# Altium PCB SubNodeMainBoard.PcbDoc
Units mm, origin at the board's own origin, x right, y up, seen from the top; angles counter-clockwise.
Board outline 61.6 x 91.44 mm, 2 copper layers (Top Layer, Bottom Layer); 6 components, 13 nets, 59 pads, 0 vias.
Unrouted connection lines stored in the file: 2.
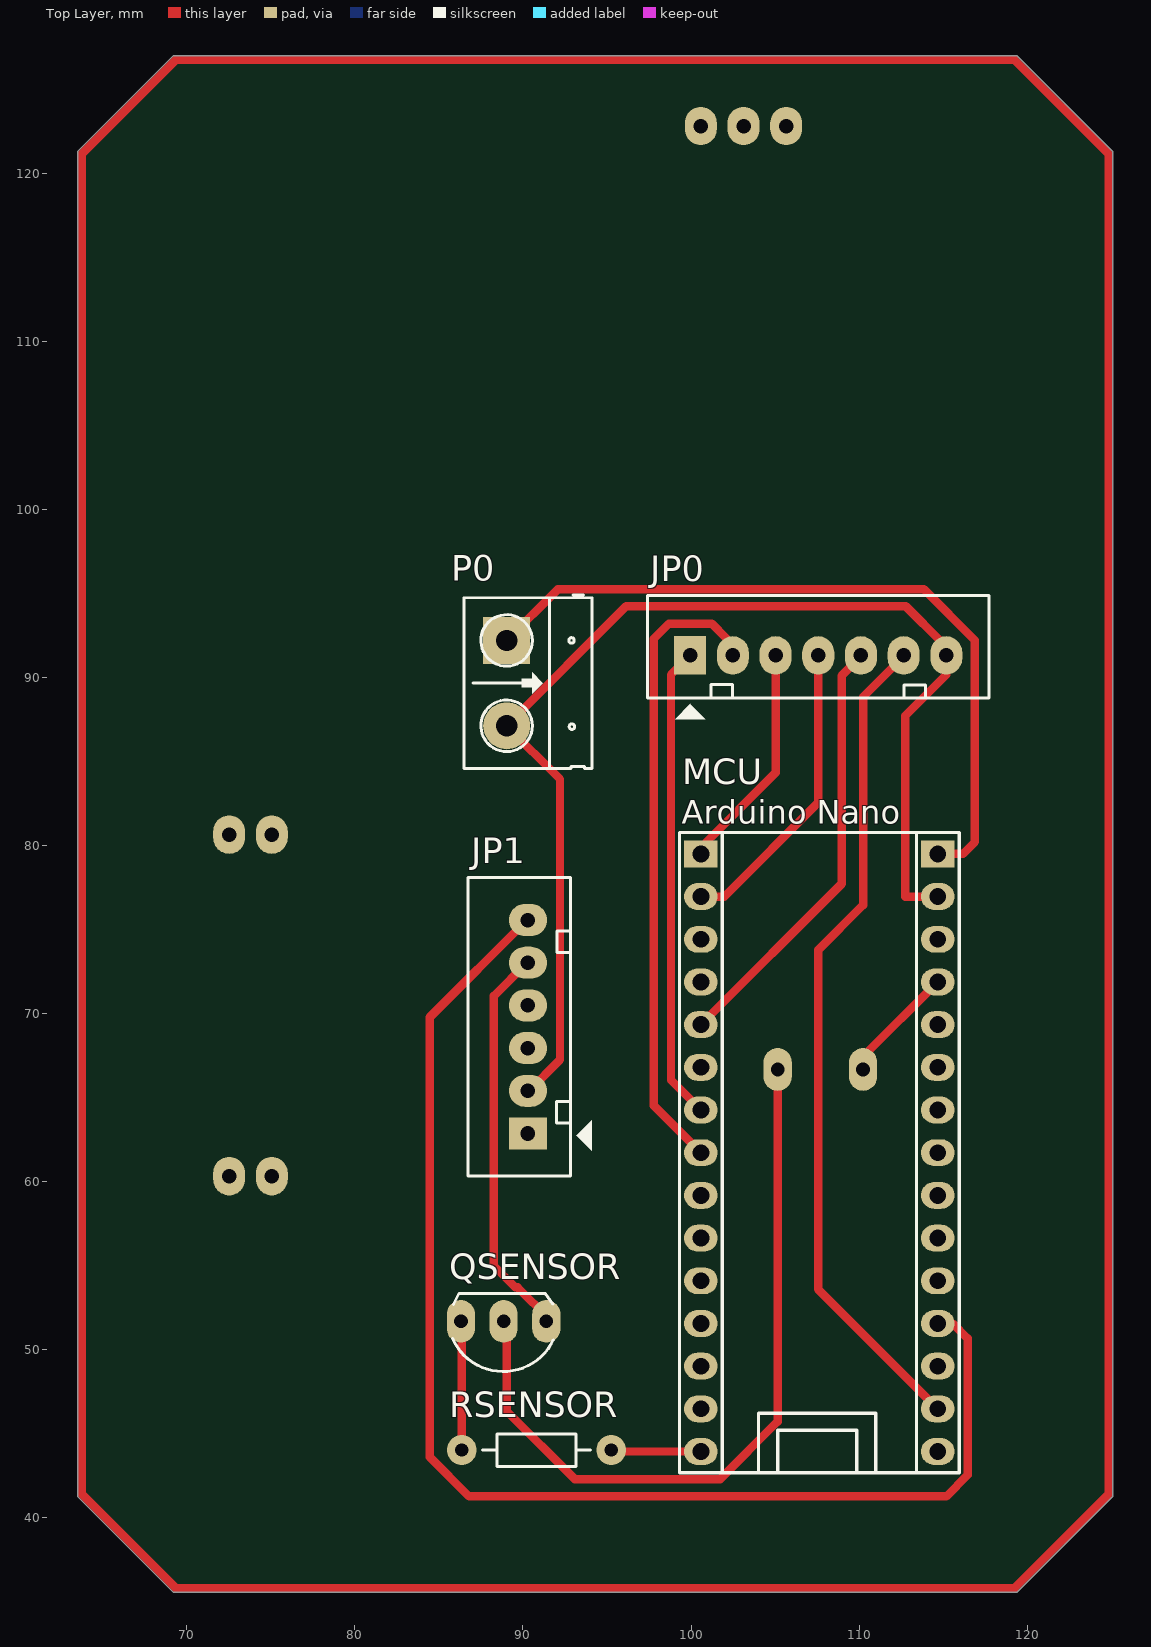
[diagram p0: Top Layer view]
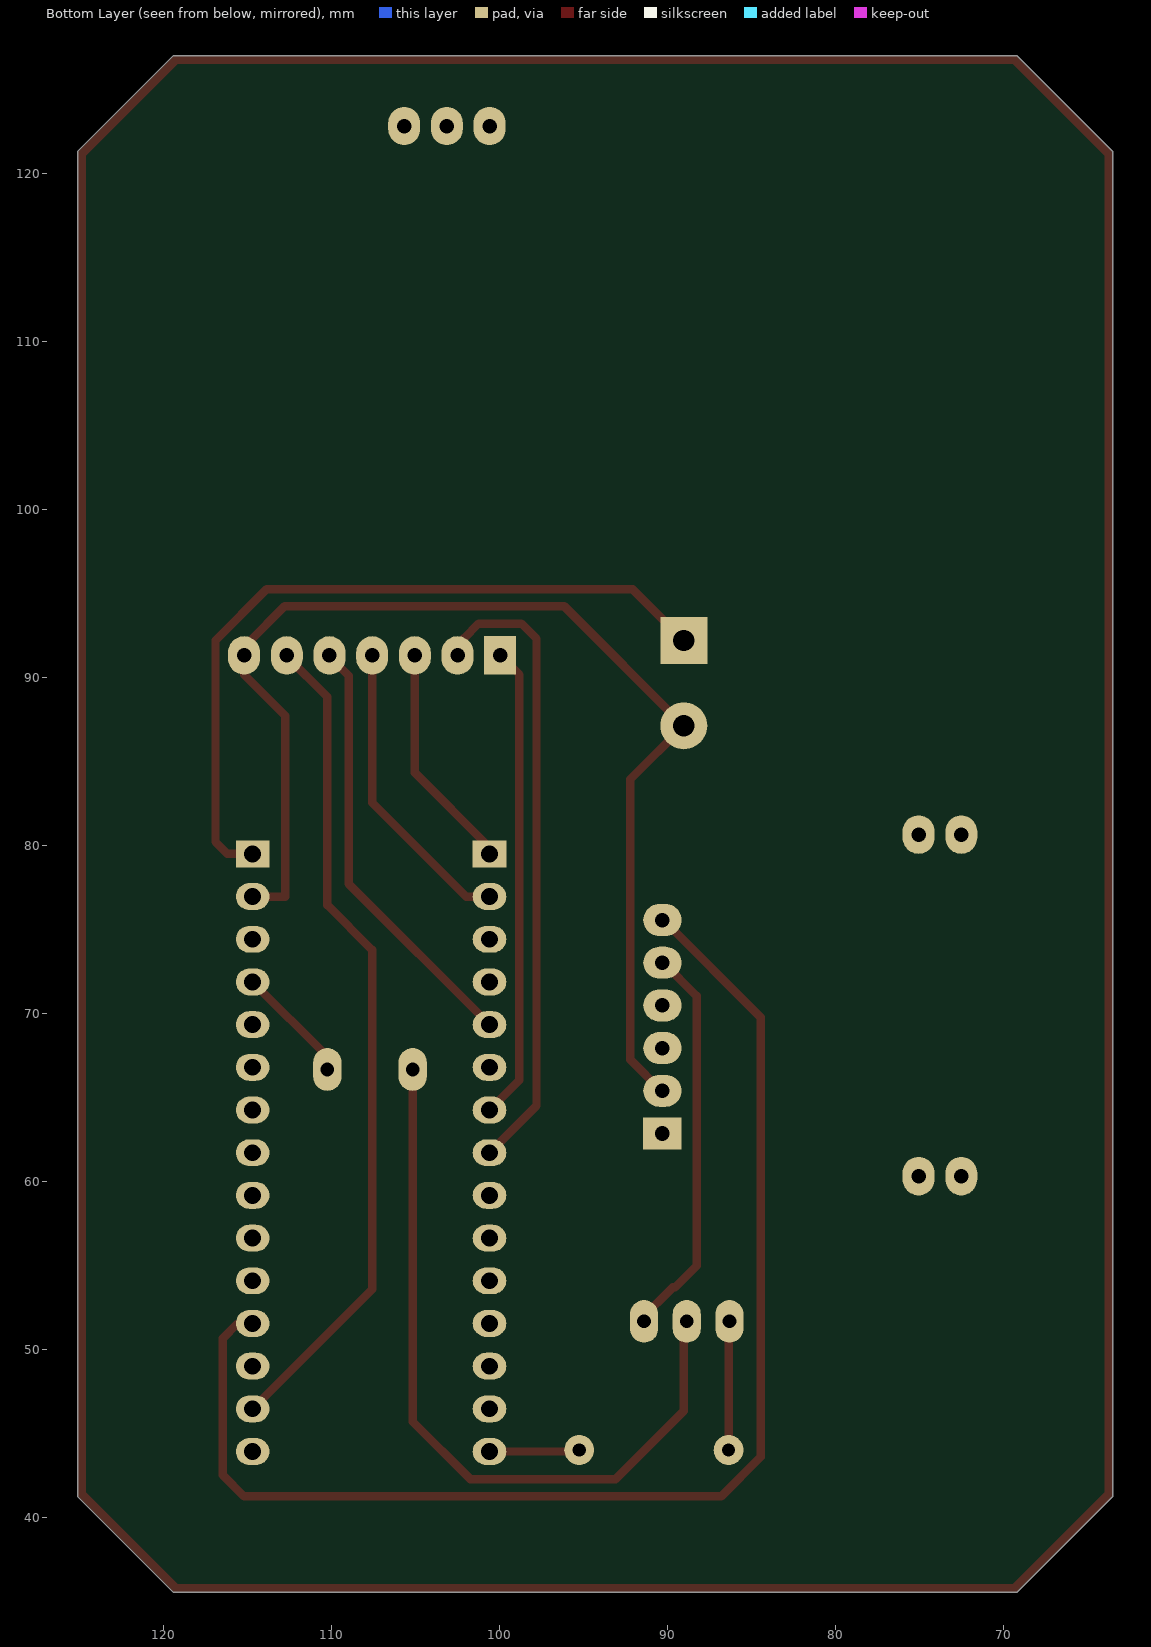
[diagram p1: Bottom Layer view, seen from below]
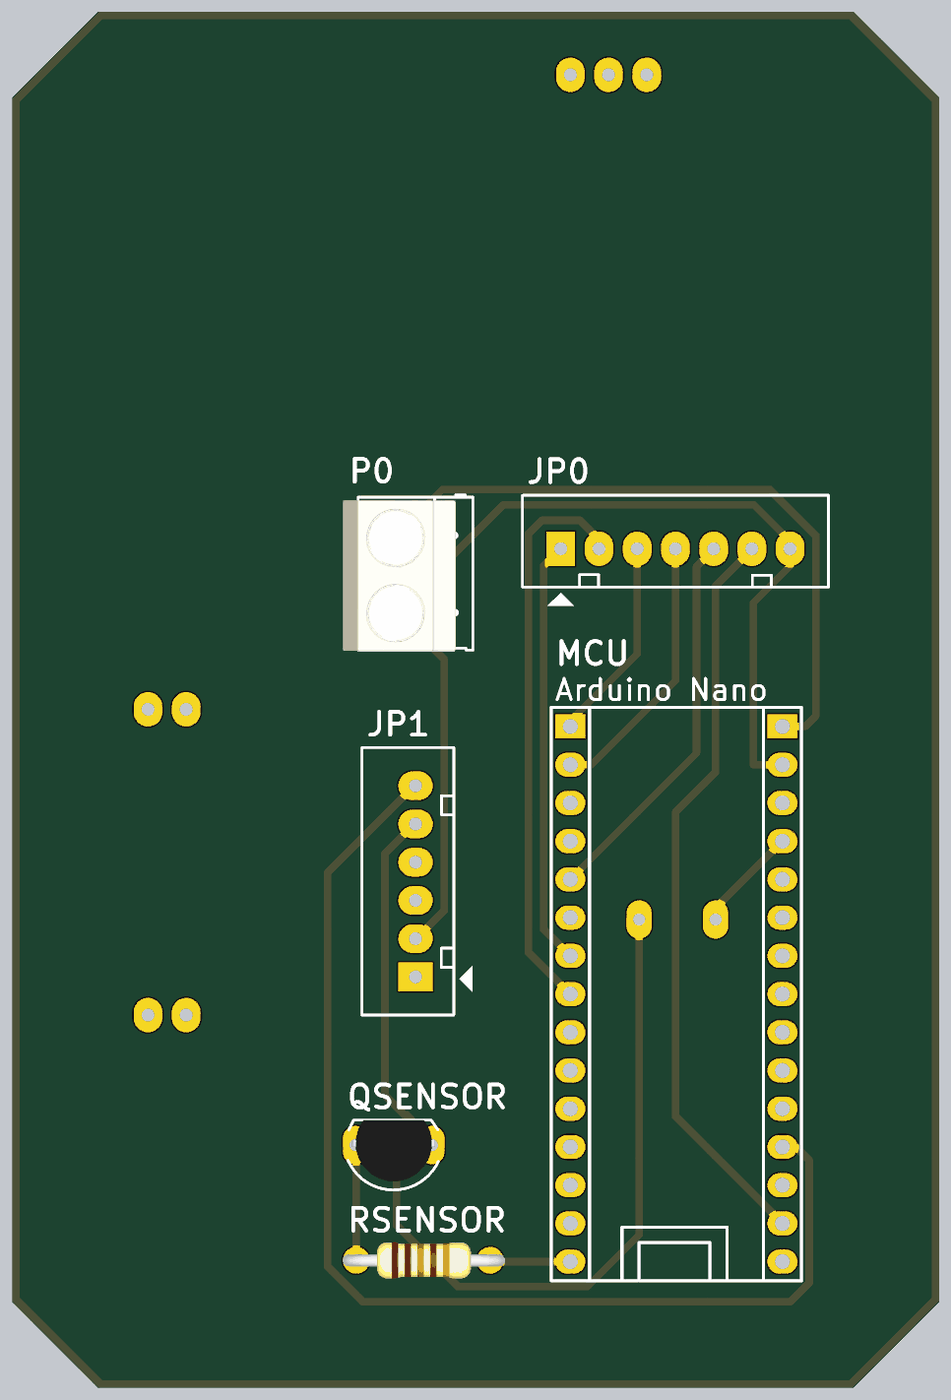
[diagram p2: 3D render of the assembled board from above, using the file's embedded part models]

## Layer stack, top to bottom
Top Solder: solder mask 0.0102, Solder Resist, Dk 3.5
Top Layer: signal copper 0.0356
Dielectric 1: dielectric 0.32, FR-4, Dk 4.8
Bottom Layer: signal copper 0.0356
Bottom Solder: solder mask 0.0102, Solder Resist, Dk 3.5

## Board outline
69.215,35.56 63.5,41.275 63.5,121.285 69.215,127 119.38,127 125.095,121.285 125.095,41.275 119.38,35.56

## Design rules (kind name [scope] priority, off if disabled: settings)
Clearance [All] p1: gap=0.5
DiffPairsRouting [All] p1: maxlimit=0.5 minlimit=0.5 mostfreqgap=0.5 toplayer_minwidth=0.5 toplayer_maxwidth=0.5 toplayer_prefwidth=0.5 bottomlayer_minwidth=0.5 bottomlayer_maxwidth=0.5 bottomlayer_prefwidth=0.5 maxuncoupledlength=12.7
PolygonConnect [All] p1: connectstyle=Relief reliefconductorwidth=0.5 reliefentries=4 polygonreliefangle="90 Angle" airgapwidth=0.5
RoutingLayers [All] p1: top layer_v5=TRUE bottom layer_v5=FALSE
RoutingVias [All] p1: holewidth=0.711 width=0.5 viastyle="Through Hole" minholewidth=0.711 minwidth=0.5 maxholewidth=0.711 maxwidth=0.5
SolderMaskExpansion [All] p1: expansion=0.102
Width [All] p1: maxlimit=0.5 minlimit=0.5 preferedwidth=0.5
28 further rules are at their usual default settings.

## Components (designator, comment, footprint, x,y, rotation, side; value= is the part's Value field where it differs from the comment)
JP0 "LORA" CON7 99.949,91.313 r0 top
JP1 "SENSOR" CON6 90.297,62.865 r90 top
MCU "Arduino Nano" PCBComponent_1 107.442,60.706 r90 top
P0 "Power Source" HED2 89.027,92.202 r270 top
QSENSOR "C1815" QTO-92 88.849,51.689 r180 top
RSENSOR "1k" R1/4W 95.25,44.031 r180 top

## Footprints (in the part's own frame and the unit in brackets; to place one, negate y for a bottom-side part, rotate by r counter-clockwise, add the part's x,y. Pads: shape width x height; smd on the part's side, far side on the other; paste and mask are expansions set on the pad)
CON6 [mil] "CON6"
  rect 75x90 hole 34: 1(0,0)
  oval 75x90 hole 34: 2(100,0) 3(200,0) 4(300,0) 5(400,0) 6(500,0)
  silkscreen extent -100,-150 600,140
CON7 [mil] "CON7"
  rect 75x90 hole 34: 1(0,0)
  oval 75x90 hole 34: 2(100,0) 3(200,0) 4(300,0) 5(400,0) 6(500,0) 7(600,0)
  silkscreen extent -100,-150 700,140
HED2 [mil] "Header 2, 2 pin, hight 300mil, Pin to Pin 200, Colour Green"
  rect 110x110 hole 50: 1(0,0)
  round 110 hole 50: 2(200,0)
  silkscreen extent -106,-100 300,200, body extent -92,-140 302,155, height 394
PCBComponent_1 [mm]
  rect 1.6x2 hole 1: 1(18.796,6.858) 30(18.796,-7.239)
  oval 1.6x2 hole 1: 2(16.256,6.858) 3(13.716,6.858) 4(11.176,6.858) 5(8.636,6.858) 6(6.096,6.858) 7(3.556,6.858) 8(1.016,6.858) 9(-1.524,6.858) 10(-4.064,6.858) 11(-6.604,6.858) 12(-9.144,6.858) 13(-11.684,6.858) 14(-14.224,6.858) 15(-16.764,6.858) 16(-16.764,-7.239) 17(-14.224,-7.239) 18(-11.684,-7.239) 19(-9.144,-7.239) 20(-6.604,-7.239) 21(-4.064,-7.239) 22(-1.524,-7.239) 23(1.016,-7.239) 24(3.556,-7.239) 25(6.096,-7.239) 26(8.636,-7.239) 27(11.176,-7.239) 28(13.716,-7.239) 29(16.256,-7.239)
  silkscreen extent -18.03,-8.51 20.07,8.13
QTO-92 [mil] "TO-92"
  oval 66x100 hole 32: 1(-100,0) 2(0,0) 3(100,0)
  silkscreen extent -117,-65 120,118, body extent -109,-66 109,95, height 245
R1/4W [mil] "R 1/4W, 2 Pin, 350mil"
  round 70 hole 31: 1(0,0) 2(350,0)
  silkscreen extent 48,-38 302,38, body extent -40,-47 386,47, height 111

## Part data
JP0: library part Con7, "Connector 7"
JP1: library part Con6, "Connector 6"
MCU: library part Component_1
P0: library part Hed2, "Header 2 (Green)"
QSENSOR: "NPN 600mW, ECB"
RSENSOR: library part R1/4W, "Resistor 1/4W"

## Free pads (board coordinates)
  oval 1.676x2.54 hole 0.813: 2(105.156,66.675) 2(110.236,66.675)
  oval 1.905x2.286 hole 0.864: FIX(72.517,60.325) FIX(72.517,80.645) FIX(75.057,60.325) FIX(75.057,80.645) ""(100.584,122.809) ""(103.124,122.809) ""(105.664,122.809)

## Nets (pads, with @x,y where several pads share a name; then routed paths per layer and width w, separated by ;. In a path a pad name is that pad's centre, name@x,y a point inside that pad or via, vN(x,y) a via of type N, cw(c..) or ccw(c..) an arc to the next point about the centre after c; other vN are vias at no path point)
+5V: MCU.27 pad.2 QSENSOR.2 | length 52.1
  Top Layer w0.5: QSENSOR.2@89.027,51.689 89.027,46.355 93.091,42.291 101.727,42.291 105.156,45.72 pad.2@105.156,66.167 ; pad.2@110.236,66.675 110.236,67.437 MCU.27
GND: JP0.7 JP1.2 MCU.4 MCU.29 P0.2 | length 71.8
  Top Layer w0.5: JP1.2 90.355,65.405 92.202,67.252 92.202,83.947 P0.2 96.139,94.234 112.776,94.234 114.935,92.075 114.935,91.567 JP0.7 115.189,90.17 112.75,87.731 112.75,76.962 MCU.29
NetJP0_1: JP0.1 MCU.7 | length 28.3
  Top Layer w0.5: JP0.1 98.806,90.17 98.806,66.04 MCU.7
NetJP0_2: JP0.2 MCU.8 | length 36.8
  Top Layer w0.5: MCU.8 97.79,64.516 97.79,92.31 98.686,93.206 101.231,93.206 JP0.2@102.108,92.329
NetJP0_3: JP0.3 MCU.1 | length 13.7
  Top Layer w0.5: MCU.1 100.584,79.883 105.029,84.328 JP0.3
NetJP0_4: JP0.4 MCU.2 | length 18.1
  Top Layer w0.5: MCU.2 101.981,76.962 107.569,82.55 JP0.4
NetJP0_5: JP0.5 MCU.5 | length 25.9
  Top Layer w0.5: MCU.5 108.966,77.724 108.966,90.112 110.109,91.255 JP0.5
NetJP0_6: JP0.6 MCU.17 | length 49.9
  Top Layer w0.5: JP0.6 112.649,91.255 110.236,88.842 110.236,76.454 107.569,73.787 107.569,53.594 MCU.17
NetJP1_5: JP1.5 QSENSOR.1 | length 23.7
  Top Layer w0.5: JP1.5@90.355,73.025 90.239,73.025 88.265,71.051 88.265,54.991 89.547,53.709 89.685,53.709 91.567,51.827 QSENSOR.1@91.567,51.689
NetJP1_6: JP1.6 MCU.19 | length 78.2
  Top Layer w0.5: JP1.6 90.239,75.565 84.455,69.781 84.455,43.618 86.798,41.275 115.189,41.275 116.459,42.545 116.459,50.673 115.57,51.562 MCU.19
NetMCU_15: MCU.15 RSENSOR.1 | length 5.4
  Top Layer w0.5: RSENSOR.1@95.25,44.196 95.504,43.942 MCU.15
NetMCU_30: MCU.30 P0.1 | length 44.9
  Top Layer w0.5: P0.1 92.075,95.25 113.85,95.25 116.891,92.209 116.891,80.213 116.181,79.502 MCU.30
NetQSENSOR_3: QSENSOR.3 RSENSOR.2 | length 7.5
  Top Layer w0.5: RSENSOR.2@86.36,44.196 86.36,51.562 QSENSOR.3@86.487,51.689
pads on no net: JP1.1 JP1.3 JP1.4 MCU.3 MCU.6 MCU.9 MCU.10 MCU.11 MCU.12 MCU.13 MCU.14 MCU.16 MCU.18 MCU.20 MCU.21 MCU.22 MCU.23 MCU.24 MCU.25 MCU.26 MCU.28
copper on no net: | length 290.9
  Top Layer w0.5: 63.754,41.402 69.342,35.814 118.999,35.814 119.253,35.814 124.841,41.402 124.841,121.158 119.253,126.746 69.342,126.746 63.754,121.158 63.754,41.402